# Altium PCB SensorPCB.PcbDoc
Units mm, origin at the board's own origin, x right, y up, seen from the top; angles counter-clockwise.
Board outline 28.5 x 13.3 mm, 2 copper layers (Top Layer, Bottom Layer); 21 components, 19 nets, 87 pads, 125 vias.
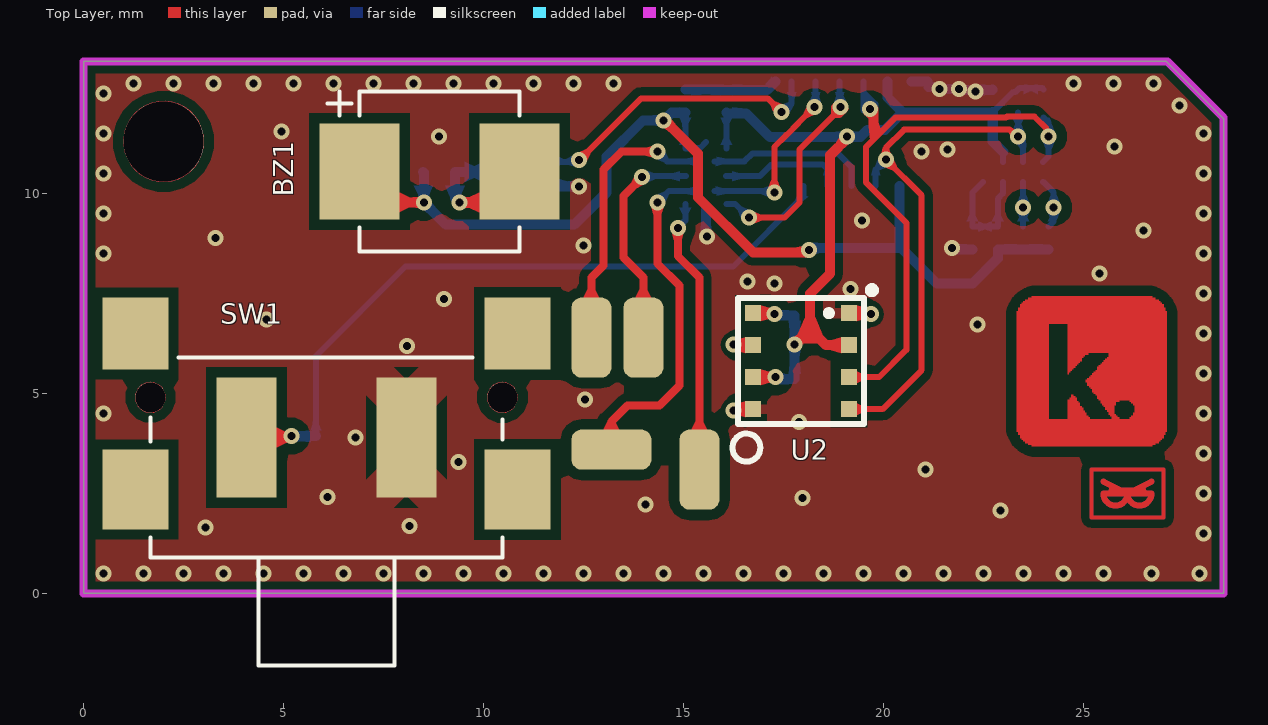
[diagram p0: Top Layer view]
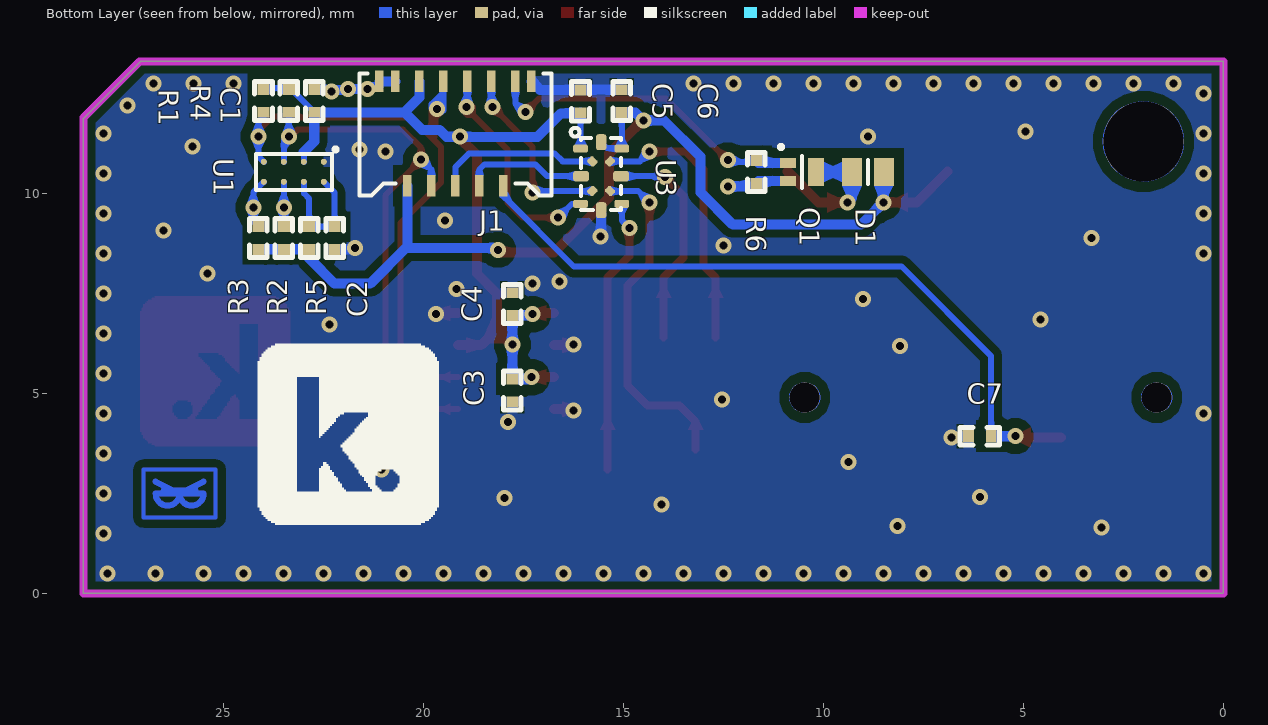
[diagram p1: Bottom Layer view, seen from below]
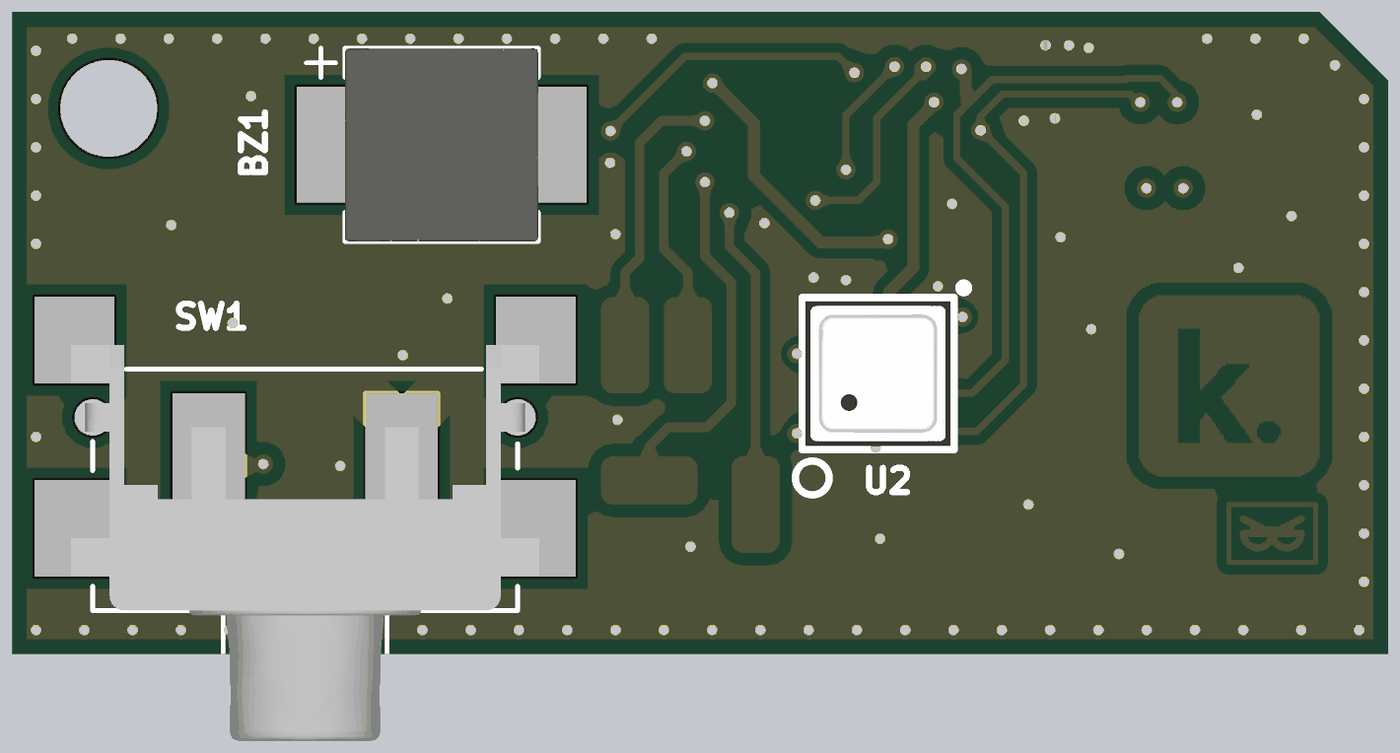
[diagram p2: 3D render of the assembled board from above, using the file's embedded part models]
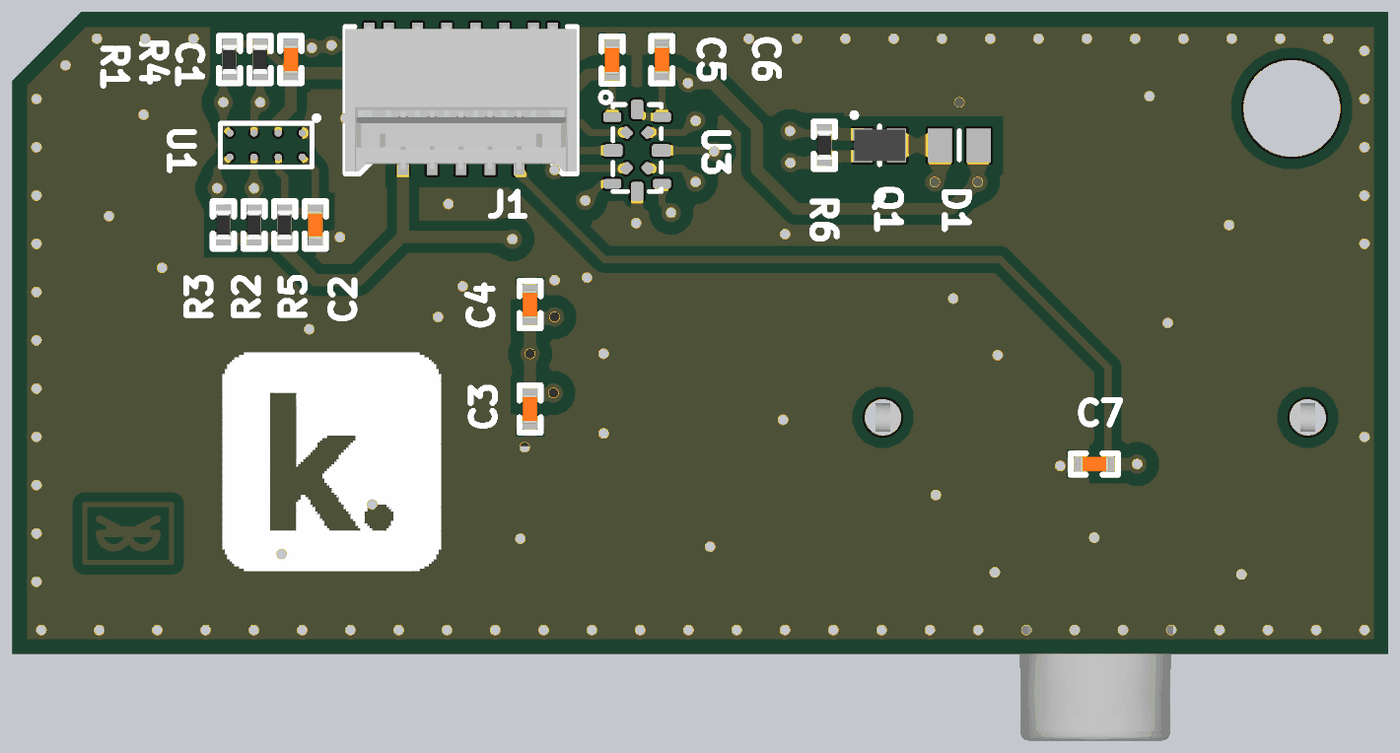
[diagram p3: 3D render of the assembled board from below, using the file's embedded part models]

## Layer stack, top to bottom
Top Solder: solder mask 0.0102, Solder Resist, Dk 3.5
Top Layer: signal copper 0.0356
Dielectric 1: dielectric 0.32, FR-4, Dk 4.8
Bottom Layer: signal copper 0.0356
Bottom Solder: solder mask 0.0102, Solder Resist, Dk 3.5

## Board outline
0.005,0.005 0.005,13.305 27.073,13.305 28.505,11.873 28.505,0.005

## Design rules (kind name [scope] priority, off if disabled: settings)
Clearance Clearance_2 [WithinRoom('ignore_clearence')  or WithinRoom('ignore_clearence_1') vs isPad  or IsTrack] p1: gap=0.1 ignorepadtopadclearanceinfootprint=FALSE
Clearance Clearance_1 [WithinRoom('J1_clearance') vs IsPad or IsTrack] p2: gap=0.12 ignorepadtopadclearanceinfootprint=FALSE
Clearance JLC_PCB_clearance [All] p3: gap=0.254 ignorepadtopadclearanceinfootprint=FALSE except(0: Arc-Text Arc-Hole Track-Text Track-Hole SMDPad-Hole THPad-Hole Via-Hole Fill-Hole Poly-Hole Region-Hole Text-Hole; 0.1: SMDPad-Text THPad-Text Via-Text Fill-Text Poly-Text Region-Text Text-Text; 0.127: Arc-Arc Arc-Track Arc-SMDPad Track-Track Track-SMDPad SMDPad-SMDPad; 0.2: Arc-THPad Arc-Via Arc-Fill Arc-Poly Arc-Region Track-THPad Track-Via Track-Fill Track-Poly Track-Region)
Clearance [All] p4: gap=0.254 ignorepadtopadclearanceinfootprint=FALSE except(0: Arc-Hole Track-Hole SMDPad-Hole THPad-Hole Via-Hole Fill-Hole Poly-Hole Region-Hole Text-Hole)
MinimumSolderMaskSliver [All] p1: minsoldermaskwidth=0
PlaneClearance "JLC_PCB_PowrPlane clearance" [All] p1: clearance=0.25
PlaneClearance [All] p2: clearance=0.508
PlaneConnect JLC_PCB_PowerPlane [All] p1: planeconnectstyle=Relief reliefexpansion=0.25 reliefentries=4 reliefconductorwidth=0.25 reliefairgap=0.15
PlaneConnect [All] p2: planeconnectstyle=Relief reliefexpansion=0.508 reliefentries=4 reliefconductorwidth=0.254 reliefairgap=0.254
PolygonConnect PolygonConnect_2 [InComponent('SW1')] p1: thpad.connectstyle=NoConnect thpad.reliefconductorwidth=0.254 thpad.reliefentries=4 thpad.polygonreliefangle="90 Angle" thpad.airgapwidth=0.254 smdpad.connectstyle=Relief smdpad.reliefconductorwidth=1 smdpad.reliefentries=4 smdpad.polygonreliefangle="45 Angle" smdpad.airgapwidth=0.254 via.connectstyle=Relief via.reliefconductorwidth=0.254 via.reliefentries=4 via.polygonreliefangle="90 Angle" via.airgapwidth=0.254
PolygonConnect PolygonConnect_1 [IsVia] p2: connectstyle=Direct reliefconductorwidth=0.254 reliefentries=4 polygonreliefangle="90 Angle" airgapwidth=0.254
PolygonConnect "JLC_PCB_Polygon connect" [All] p3: connectstyle=Relief reliefconductorwidth=0.254 reliefentries=4 polygonreliefangle="90 Angle" airgapwidth=0.15
PolygonConnect [All] p4: connectstyle=Relief reliefconductorwidth=0.254 reliefentries=4 polygonreliefangle="90 Angle" airgapwidth=0.254
RoomDefinition ignore_clearence_1 [False] p1: confinementstyle=ConfineIn formatcopy=TRUE lockcomponents=FALSE outline 9.825,11.4 12.485,11.4 12.485,10.05 9.825,10.05
RoomDefinition ignore_clearence [False] p2: confinementstyle=ConfineIn formatcopy=TRUE lockcomponents=FALSE outline 14.4,12.225 17.06,12.225 17.06,9.075 14.4,9.075
RoomDefinition J1_clearance [False] p3: confinementstyle=ConfineIn formatcopy=TRUE lockcomponents=FALSE outline 17.2,13.5 21.26,13.5 21.26,12.4 17.2,12.4
RoomDefinition KB [False] p4: confinementstyle=ConfineIn formatcopy=TRUE lockcomponents=FALSE outline 25.02,3.28 27.18,3.28 27.18,1.72 25.02,1.72
RoutingVias JLC_PCB_via [All] p1: holewidth=0.2 width=0.4 viastyle="Through Hole" minholewidth=0.2 minwidth=0.4 maxholewidth=0.5 maxwidth=1
RoutingVias [All] p2: holewidth=0.711 width=1.27 viastyle="Through Hole" minholewidth=0.711 minwidth=1.27 maxholewidth=0.711 maxwidth=1.27
SilkToSilkClearance [All] p1: silktosilkclearance=0.1
SilkToSolderMaskClearance [IsPad] p1: minsilkscreentomaskgap=0 clearancetoexposedcopper=TRUE
SolderMaskExpansion JLC_PCB_SolderMask [All] p1: expansion=0.05 istentingtop=FALSE
SolderMaskExpansion [All] p2: expansion=0.102 istentingtop=FALSE
Width Width_1 [WithinRoom('KB')] p1: maxlimit=0.254 minlimit=0.1 preferedwidth=0.254
Width JLC_PCB_width [All] p2: maxlimit=1 minlimit=0.127 preferedwidth=0.15
Width [All] p3: maxlimit=0.254 minlimit=0.254 preferedwidth=0.254
25 further rules are at their usual default settings.

## Components (designator, comment, footprint, x,y, rotation, side; value= is the part's Value field where it differs from the comment)
BZ1 "CMT-4023S-SMT-TR" CMT-4023S-SMT-TR 8.9,10.55 r0 top
C1 "100n" CAPC0603X03L_C 22.733,12.319 r270 bottom
C2 "100n" CAPC0603X03L_C 22.225,8.89 r90 bottom
C3 "100n" CAPC0603X03L_C 17.78,5.08 r90 bottom
C4 "100n" CAPC0603X03L_C 17.78,7.239 r270 bottom
C5 "100n" CAPC0603X03L_C 16.079,12.308 r270 bottom
C6 "100n" CAPC0603X03L_C 15.05,12.312 r270 bottom
C7 "100n" CAPC0603X03L_C 6.096,3.937 r180 bottom
D1 "BAS21LDYL" BAS21LDYL 8.89,10.541 r180 bottom
J1 "5047541100" 5047541100 19.208,11.5 r0 bottom locked
Q1 "RV2C010UNT2L" DFN65P100X40-3L 10.541,10.541 r180 bottom
R1 "4.7k" RESC0603X03L_C 24.003,12.319 r90 bottom
R2 "4.7k" RESC0603X03L_C 23.495,8.89 r270 bottom
R3 "4.7k" RESC0603X03L_C 24.13,8.89 r270 bottom
R4 "4.7k" RESC0603X03L_C 23.368,12.319 r90 bottom
R5 "200k" RESC0603X03L_C 22.86,8.89 r90 bottom
R6 "200k" RESC0603X03L_C 11.684,10.541 r270 bottom
SW1 "1571300-2" 1571300-2 6.073,4.905 r0 top locked
U1 "PCA9306YZTR" PCA9306YZTR 23.245,10.545 r270 bottom
U2 "BME680" BME680 17.937,5.812 r0 top locked
U3 "TXU0304DTRR" TXU0304DTR 15.561,10.435 r180 bottom

## Footprints (in the part's own frame and the unit in brackets; to place one, negate y for a bottom-side part, rotate by r counter-clockwise, add the part's x,y. Pads: shape width x height; smd on the part's side, far side on the other; paste and mask are expansions set on the pad)
1571300-2 [mm]
  rect 1.5x3 smd: P1(-2,-1) P2(2,-1)
  rect 1.65x2 smd: P3(-4.775,-2.3) P4(4.775,-2.3)
  rect 1.65x1.8 smd: P5(4.775,1.6) P6(-4.775,1.6)
  round 0.75 hole 0.75 unplated: P14(-4.4,0) P15(4.4,0)
  Multi-Layer circle w0.01: c-4.4,0 r0.375
  Multi-Layer circle w0.01: c4.4,0 r0.375
  silkscreen extent -4.4,-6.7 4.4,1, body extent -4.85,-6.7 4.85,1.5, height 8.1
5047541100 [mm] "Connector FPC11"
  rect 0.22x0.54 smd: P1(-1.5,-1.307) P2(-1.2,1.308) P3(-0.9,-1.307) P4(-0.6,1.308) P5(-0.3,-1.307) P6(0,1.308) P7(0.3,-1.307) P8(0.6,1.308) P9(0.9,-1.307) P10(1.2,1.308) P11(1.5,-1.307) P12(-1.9,-1.307) P13(1.9,-1.307)
  silkscreen extent -2.4,-1.5 2.4,1.55, body extent -2.4,-1.5 2.4,1.5, height 1.46
BAS21LDYL [mm]
  rect 0.5x0.7 smd: P1(-0.4,0) P2(0.4,0)
  silkscreen extent 0,-0.3 0,0.3, body extent -0.5,-0.3 0.5,0.3, height 0.4
BME680 [mm]
  rect 0.4x0.4 smd mask+0.1: 1(1.2,1.2) 2(1.2,0.4) 3(1.2,-0.4) 4(1.2,-1.2) 5(-1.2,-1.2) 6(-1.2,-0.4) 7(-1.2,0.4) 8(-1.2,1.2)
  silkscreen extent -1.71,-2.51 1.83,1.82, body extent -1.5,-1.5 1.5,1.5, height 0.93
CAPC0603X03L_C [mm]
  rect 0.27x0.3 smd mask+0.05: 1(-0.285,0) 2(0.285,0)
  silkscreen extent -0.49,-0.22 0.49,0.22, body extent -0.3,-0.15 0.3,0.15, height 0.3
CMT-4023S-SMT-TR [mm] "Buzzer"
  rect 2x2.4 smd: P1(-2,0) P2(2,0)
  silkscreen extent -2.8,-2 2,2, body extent -2,-2 2,2, height 2
DFN65P100X40-3L [mm]
  rect 0.4x0.25 smd: 1(-0.35,0.225) 2(-0.35,-0.225)
  rect 0.4x0.7 smd: 3(0.35,0)
  silkscreen extent -0.58,-0.4 0,0.67, body extent -0.53,-0.33 0.53,0.33, height 0.4
PCA9306YZTR [mm] "BGA, 8-Leads, Body 1.9x0.9mm, Pitch 0.5mm"
  round 0.15 smd: A1(-0.25,0.75) A2(0.25,0.75) B1(-0.25,0.25) B2(0.25,0.25) C1(-0.25,-0.25) C2(0.25,-0.25) D1(-0.25,-0.75) D2(0.25,-0.75)
  silkscreen extent -0.61,-0.95 0.45,1.09, body extent -0.45,-0.95 0.45,0.95, height 0.63
RESC0603X03L_C [mm]
  rect 0.27x0.3 smd: 1(-0.285,0) 2(0.285,0)
  silkscreen extent -0.49,-0.22 0.49,0.22, body extent -0.3,-0.15 0.3,0.15, height 0.23
TXU0304DTR [mm]
  rrect50% 0.37x0.2 smd mask+0.05: P1(-0.515,0.69) P5(-0.515,-0.69) P7(0.515,-0.69) P11(0.515,0.69)
  rrect50% 0.2x0.23 smd rot 45 mask+0.05: P2(-0.22,0.37) P8(0.22,-0.37)
  rrect50% 0.4x0.26 smd mask+0.05: P3(-0.5,0) P9(0.5,0)
  rrect50% 0.2x0.23 smd rot 135 mask+0.05: P4(-0.22,-0.37) P10(0.22,0.37)
  rrect50% 0.26x0.4 smd mask+0.05: P6(0,-0.85) P12(0,0.85)
  silkscreen extent -0.76,-0.85 0.5,1.21, body extent -0.5,-0.85 0.5,0.85, height 0.4

## Part data
BZ1: "4 mm, 3 Vo-p, 70 dB, Surface Mount (SMT), Magnetic Audio Transducer Buzzer", Frequency=4kHz, Manufacturer=CUI, Max Operating Temperature=70°C, Min Operating Temperature=-20°C, Operating Supply Current=90mA, Supplier Part Number 1=490-CMT-4023S-SMT-TR, Voltage Rating=3V, Category="Audio Products", ComponentLink1Description=https://www.cui.com/product/resource/digikeypdf/cmt-4023s-smt.pdf?src-supplier=Digi-Key, ComponentLink1URL=https://www.cui.com/product/resource/digikeypdf/cmt-4023s-smt.pdf?src-supplier=Digi-Key, ComponentLink2Description=http://www.cui.com/product/resource/digikeypdf/cmt-4023s-smt.pdf?src-supplier=Digi-Key, ComponentLink2URL=http://www.cui.com/product/resource/digikeypdf/cmt-4023s-smt.pdf?src-supplier=Digi-Key, Lead Free="Lead Free", Length=4mm, Manufacturer Part Number=CMT-4023S-SMT-TR, Mount="Surface Mount", Packaging="Tape and Reel", RoHS=No, Sensing Method=Magnetic, Supplier 1=Mouser, Termination=Solder, Width=4mm
C1 C2 C3 C4 C5 C6 C7: library part C0201
D1: "BAS21LD/SOD882/SOD2", Manufacturer=Nexperia, Supplier Part Number 1=771-BAS21LDYL, Manufacturer Part Number=BAS21LDYL, Pricing 1="1=0.30000, 10=0.23700, 50=0.23700, 100=0.12600, 1000=0.05700, 10000=0.03900 (USD)", RoHS=No, Stock 1=752, Supplier 1=Mouser
J1: "Conn FFC/FPC Connector SKT 11 POS 0.3mm Solder RA SMD Easy-On™ T/R", Contact Resistance=30mOhm, Manufacturer="Wurth Elektronik", Manufacturer Part Number=687124182122, Operating Temperature="-25 to +85degC", Rated Current=0.5A, Supplier Part Number 1=538-504754-1100, Working Voltage=50VAC, Category="FFC / FPC", ComponentLink1Description=Manufacturer, ComponentLink1URL=http://www.we-online.de, ComponentLink2Description=Datasheet, ComponentLink2URL=https://katalog.we-online.com/em/datasheet/687124182122.pdf, ComponentLink3Description=https://www.molex.com/pdm_docs/ps/PS-504754-002.pdf?src-supplier=Digi-Key, ComponentLink3URL=https://www.molex.com/pdm_docs/ps/PS-504754-002.pdf?src-supplier=Digi-Key, Length=14mm, Mounting Technology=SMT, Packaging="Tape and Reel", Pin Number=24, Pitch=0.5mm, Pricing 1="1=0.78000, 10=0.62000, 50=0.62000, 100=0.51700, 500=0.51200, 1000=0.51200, 5000=0.41900, 10000=0.41100, 25000=0.35200 (USD)", Published Date="March 2021", RoHS=No, Stock 1=21094, Supplier 1=Mouser, Type=Horizontal
Q1: "N-Channel MOSFET, 20V, 1A, 470mOhm, 400mW", Manufacturer="Rohm Semiconductor", Part number IPS=00000009976, Supplier Part Number 1=RV2C010UNT2LCT-ND, Artikkelnr Noca=35010020, Component Class=Semiconductors, ComponentLink1Description=Datasheet, ComponentLink1URL=N.A., ComponentLink2Description="Supplier link", ComponentLink2URL=N.A., Footprint Doc=DFN-3, HelpURL=http://rohmfs.rohm.com/en/products/databook/datasheet/discrete/transistor/mosfet/rv2c010unt2l-e.pdf, LatestRevisionDate=2016-08-09, Manufacturer Part Number=RV2C010UNT2L, Note=N.A., Pad Count=3, Part Number=RV2C010UNT2L, PartId=101300132, Published=2016-08-09, Supplier 1=Digi-Key, Supplier 2=Mouser, Supplier Part Number 2=755-RV2C010UNT2L
R1 R2 R3 R4 R5 R6: library part R0201
SW1: "Switch Tactile OFF (ON) SPST Round Button Gull Wing 0.05A 12VDC 1.27N SMD Loose Piece", Manufacturer="TE Connectivity", Supplier Part Number 1=571-15713002, Category="Pushbutton Switches", ComponentLink1Description=https://datasheet.ciiva.com/2901/eng-cd-1571300-j-2901544.pdf?src-supplier=Digi-Key, ComponentLink1URL=https://datasheet.ciiva.com/2901/eng-cd-1571300-j-2901544.pdf?src-supplier=Digi-Key, ComponentLink2Description=https://datasheet.ciiva.com/30102/eng-cat-1308390-0904-e26-e28-30102661.pdf?src-supplier=Onlinecomponents.com, ComponentLink2URL=https://datasheet.ciiva.com/30102/eng-cat-1308390-0904-e26-e28-30102661.pdf?src-supplier=Onlinecomponents.com, ComponentLink3Description=https://datasheet.ciiva.com/15226/getdatasheetpartid-240878-15226635.pdf?src-supplier=Verical, ComponentLink3URL=https://datasheet.ciiva.com/15226/getdatasheetpartid-240878-15226635.pdf?src-supplier=Verical, ComponentLink4Description=https://datasheet.ciiva.com/8164/eng-cs-1308111-1-switches-core-program-catalog-0308-8164774.pdf?src-supplier=Avnet, ComponentLink4URL=https://datasheet.ciiva.com/8164/eng-cs-1308111-1-switches-core-program-catalog-0308-8164774.pdf?src-supplier=Avnet, Manufacturer Part Number=1571300-2, Pricing 1="1=0.69000, 10=0.66000, 50=0.62500, 100=0.55100, 1000=0.41800, 10000=0.39300 (USD)", RoHS=Yes, Stock 1=17816, Supplier 1=Mouser
U1: "PCA9306 2-BIT Bidirectional I2C", 5V Tolerant I/O=Yes, Manufacturer="Texas Instruments", Max Frequency(kHz)=400, Max Operating Temperature=85°C, Max Supply Voltage=5.5V, Min Operating Temperature=-40°C, Min Supply Voltage=1.2V, On-Chip Power-on-Reset=No, Package Quantity=3000, Rating=Catalog, Supplier Part Number 1=595-PCA9306YZTR, Category="Voltage Level Shifters", ComponentLink1Description=Datasheet, ComponentLink1URL=http://www.ti.com/general/docs/lit/getliterature.tsp?genericPartNumber=PCA9306&fileType=pdf, ComponentLink2Description="Package Specification", ComponentLink2URL=http://www.ti.com/litv/pdf/mpds049b, ComponentLink3Description=https://datasheet.ciiva.com/1504/1862428-1504150.pdf?src-supplier=Element14, ComponentLink3URL=https://datasheet.ciiva.com/1504/1862428-1504150.pdf?src-supplier=Element14, ComponentLink4Description=https://datasheet.ciiva.com/1899/pca9306-1899336.pdf?src-supplier=Digi-Key, ComponentLink4URL=https://datasheet.ciiva.com/1899/pca9306-1899336.pdf?src-supplier=Digi-Key, ComponentLink5Description=https://datasheet.ciiva.com/1899/pca9306-1899335.pdf?src-supplier=Digi-Key, ComponentLink5URL=https://datasheet.ciiva.com/1899/pca9306-1899335.pdf?src-supplier=Digi-Key, ComponentLink6Description=https://datasheet.ciiva.com/1899/pca9306-1899337.pdf?src-supplier=Digi-Key, ComponentLink6URL=https://datasheet.ciiva.com/1899/pca9306-1899337.pdf?src-supplier=Digi-Key, Contact Plating=Copper,Tin,Silver, DatasheetVersion=SCPS113J, Eco-Plan="Green (RoHS & no Sb/Br)", Enable Pin=Yes, fSCLK(Max)(MHz)=400, Function="Voltage Translator", Lead Free="Lead Free", Logic Function=Translator, Manufacturer Part Number=PCA9306YZTR, Mounting Technology="Surface Mount", No. of Outputs=2, Number of Bits=2, Number of Channels=2, Number of Outputs=2, Number of Pins=8, Open Drain I/O Type=Yes, Output Type=I2C, PackageDescription="8-Ball Die-Size Ball Grid Array, 1.9 x 0.9 mm Body, 0.5 mm Pitch, Pb-Free", PackageReference=YZT8, PackageVersion="revF, Oct-2006", Packaging="Tape and Reel", PartNumber=PCA9306YZTR, Pricing 1="1=0.97000, 10=0.87600, 25=0.83100, 50=0.83100, 100=0.68300, 250=0.63900, 500=0.56400, 1000=0.44600, 10000=0.44600 (USD)", Propagation Delay=0.3ns, REACH SVHC="No SVHC", RoHS=Yes, RoHS Compliant=Yes, Series=-, SubFamily="I2C Special Function", Supplier 1=Mouser, tpd max(ns)=1.5, Vcc range(V)="0 to 5.5", Weight=8.1E-05oz
U2: "Low power gas, pressure, temperature & humidity sensor", Manufacturer=Bosch, Part number IPS=00000001800, Supplier Part Number 1=828-1077-1-ND, Artikkelnr Noca=N.A., Component Class=Misc_ICs, ComponentLink1Description=Datasheet, ComponentLink1URL=https://ae-bst.resource.bosch.com/media/_tech/media/datasheets/BST-BME680-DS001-00.pdf, ComponentLink2Description="Supplier link", ComponentLink2URL=N.A., Footprint Doc=LGA-8, HelpURL=N.A., LatestRevisionDate=2018-05-24, Manufacturer Part Number=BME680, Note=N.A., Pad Count=8, Part Number=BME680, PartId=101900532, Published=2018-05-24, Supplier 1=Digi-Key, Supplier 2=N.A., Supplier Part Number 2=N.A.
U3: "Four-channel fixed multidirectional level shifter 12-X2QFN -40 to 125", Manufacturer="Texas Instruments", Supplier Part Number 1=595-TXU0304DTRR, Manufacturer Part Number=TXU0304DTRR, Pricing 1="1=0.87000, 10=0.78200, 50=0.74200, 100=0.61000, 1000=0.39800, 10000=0.38500 (USD)", RoHS=No, Supplier 1=Mouser

## Free pads (board coordinates)
  rrect50% 1x2 smd paste-10 mask+0.05: 5(12.7,6.4) 5(14,6.4) 5(15.4,3.1)
  rrect50% 2x1 smd paste-10 mask+0.05: 5(13.2,3.6)
  round 2 hole 2 unplated: P13(2.005,11.305)

## Via types
v1: diameter 0.4, hole 0.2, Top Layer to Bottom Layer, tented both sides, 125 vias

## Nets (pads, with @x,y where several pads share a name; then routed paths per layer and width w, separated by ;. In a path a pad name is that pad's centre, name@x,y a point inside that pad or via, vN(x,y) a via of type N, cw(c..) or ccw(c..) an arc to the next point about the centre after c; other vN are vias at no path point)
1V8: C1.2 C3.2 C4.2 C5.2 J1.P9 R1.2 R4.2 U1.B1 U2.2 U2.6 U2.8 U3.P1 | length 22.5
  Top Layer w0.25: U2.6 17.296,5.412 v1(17.297,5.411) ; U2.8 17.245,7.012 v1(17.272,6.985) ; v1(17.78,6.223) 18.165,6.608 ; v1(19.095,11.433) 19.095,11.399 19.101,11.392 18.669,10.96 18.669,8.001 18.165,7.497 18.165,6.608 ; U2.2 18.561,6.212 18.165,6.608
  Bottom Layer w0.15: U3.P1 16.076,12.02 C5.2 ; C1.2 22.748,12.034 22.808,12.094 22.808,12.105 22.97,12.267 23.248,12.544 23.308,12.544 23.399,12.635 23.972,12.635 R1.2 ; U1.B1 22.995,11.041
  Bottom Layer w0.25: C5.2 16.093,12.009 16.566,12.009 17.159,11.416 19.423,11.416 19.604,11.597 20.041,11.597 20.478,12.034 ; v1(17.272,6.985) 17.303,6.954 C4.2 v1(17.78,6.223) C3.2 17.343,5.365 v1(17.297,5.411) ; J1.P9 20.108,12.404 20.478,12.034 ; C1.2 20.478,12.034
  Bottom Layer w0.254: C1.2 22.733,11.303 22.995,11.041
3V3: BZ1.P1 C6.2 D1.P2 J1.P10 R2.2 R3.2 R5.1 U3.P11 U3.P12 | length 26.7
  Top Layer w0.25: BZ1.P1 7.671,9.779 v1(8.509,9.779) ; v1(14.508,11.83) 14.535,11.83 15.367,10.997 15.367,9.906 16.743,8.53 18.089,8.53 18.15,8.591 v1(18.144,8.596)
  Bottom Layer w0.15: U3.P11 C6.2@15.046,12.023 ; U3.P11@15.054,11.133 15.221,11.133 15.226,11.138 15.415,11.138 U3.P12
  Bottom Layer w0.25: D1.P2 8.509,10.522 v1(8.509,9.779) 9.066,9.222 12.27,9.222 13.081,10.033 13.081,10.922 13.989,11.83 v1(14.508,11.83) 14.701,12.023 C6.2@15.046,12.023 ; v1(18.144,8.596) 18.155,8.596 18.205,8.646 20.437,8.646 ; J1.P10 20.408,8.675 21.336,7.747 22.225,7.747 22.86,8.382 R5.1 R2.2 R3.2
BUTT: C7.2 J1.P2 SW1.P1 | length 17.9
  Top Layer w0.254: SW1.P1 5.175,3.905 v1(5.207,3.937)
  Bottom Layer w0.15: C7.2 5.811,5.938 8.05,8.177 16.242,8.177 18.008,9.943 J1.P2
  Bottom Layer w0.254: v1(5.207,3.937) C7.2
BUZZ: J1.P1 Q1.1 R6.1 | length 8.3
  Top Layer w0.15: v1(12.396,10.835) 13.945,12.384 17.108,12.384 v1(17.448,12.044)
  Bottom Layer w0.15: R6.1 11.717,10.793 12.353,10.793 v1(12.396,10.835) ; v1(17.448,12.044) 17.505,12.044 17.708,12.247 J1.P1
  Bottom Layer w0.254: Q1.1 11.624,10.766 R6.1
GND: C1.1 C2.1 C3.1 C4.1 C5.1 C6.1 C7.1 J1.P11 J1.P12 J1.P13 Q1.2 R6.2 SW1.P2 U1.A1 U2.1 U2.5 U2.7 U3.P6 | length 8.7
  Top Layer w0.25: v1(16.256,4.572) 16.296,4.612 U2.5 ; v1(16.256,6.223) 16.267,6.212 U2.7 ; U2.1 19.658,7.012 v1(19.685,6.985)
  Bottom Layer w0.25: Q1.2 11.624,10.316 R6.2 11.761,10.179 v1(12.388,10.179) ; C6.1 15.978,12.597 15.982,12.593 C5.1 17.093,12.593 J1.P12 ; U3.P6 15.561,8.953 v1(15.584,8.93) ; J1.P11 J1.P13 ; J1.P13@21.123,12.662 21.26,12.662 21.316,12.662 21.365,12.613 v1(21.406,12.613) 21.407,12.612 21.888,12.612 21.915,12.585 22.274,12.585 v1(22.3,12.559) 22.341,12.559 22.376,12.594 22.723,12.594 C1.1 ; v1(21.717,8.636) 21.748,8.605 C2.1
  other v1: 0.5,0.5 1.5,0.5 2.5,0.5 3.5,0.5 4.5,0.5 5.5,0.5 6.5,0.5 7.5,0.5 8.5,0.5 9.5,0.5 10.5,0.5 11.5,0.5 12.5,0.5 13.5,0.5 14.5,0.5 15.5,0.5 16.5,0.5 17.5,0.5 18.5,0.5 19.5,0.5 20.5,0.5 21.5,0.5 22.5,0.5 23.5,0.5 24.5,0.5 25.5,0.5 26.7,0.5 27.9,0.5 28,1.5 3.048,1.651 8.155,1.696 22.925,2.075 14.053,2.226 17.979,2.392 6.096,2.413 28,2.5 21.05,3.1 9.376,3.297 28,3.5 6.8,3.9 17.89,4.284 0.5,4.5 28,4.5 12.54,4.855 28,5.5 8.095,6.193 28,6.5 28,6.5 22.352,6.731 4.572,6.858 9.017,7.366 28,7.5 19.177,7.62 17.272,7.747 16.6,7.8 25.4,8.001 0.5,8.5 28,8.5 12.5,8.7 3.302,8.89 26.5,9.075 19.47,9.327 0.5,9.5 28,9.5 0.5,10.5 28,10.5 20.955,11.049 21.6,11.1 25.781,11.176 8.89,11.43 0.5,11.5 28,11.5 4.953,11.557 27.4,12.2 0.5,12.5 21.89,12.61 1.25,12.75 2.25,12.75 3.25,12.75 4.25,12.75 5.25,12.75 6.25,12.75 7.25,12.75 8.25,12.75 9.25,12.75 10.25,12.75 11.25,12.75 12.25,12.75 13.25,12.75 24.75,12.75 25.75,12.75 26.75,12.75
NetBZ1_P2: BZ1.P2 D1.P1 Q1.3 | length 3.5
  Top Layer w0.254: v1(9.398,9.779) 10.129,9.779 BZ1.P2
  Bottom Layer w0.254: v1(9.398,9.779) 9.29,9.887 D1.P1 Q1.3
NetC2_2: C2.2 R5.2 U1.A2 U1.B2 | length 3
  Bottom Layer w0.15: U1.A2 22.225,10.025 C2.2 R5.2 22.86,9.876 22.987,10.003 22.987,10.287 U1.B2
SCL: J1.P8 R4.1 U1.C1 U2.4 | length 13.8
  Top Layer w0.15: U2.4 19.979,4.612 20.955,5.588 20.955,9.959 v1(20.062,10.852) 20.062,11.142 20.52,11.6 23.155,11.6 23.325,11.43 v1(23.368,11.43)
  Bottom Layer w0.15: J1.P8 19.808,10.598 v1(20.062,10.852) ; R4.1 v1(23.368,11.43) 23.495,11.303 U1.C1
SCL2: R2.1 U1.C2 | length 1.1
  Bottom Layer w0.15: R2.1 v1(23.495,9.652) U1.C2
SDA: J1.P7 R1.1 U1.D1 U2.3 | length 17.6
  Top Layer w0.15: U2.3 19.89,5.412 20.574,6.096 20.574,9.271 19.57,10.275 19.57,11.17 19.735,11.335 ; v1@19.583,12.016 19.703,11.896 ; v1(19.665,12.122) 19.703,12.084 v1@19.703,12.021 ; v1@19.799,12.126 19.802,12.124 19.802,11.761 ; v1(24.13,11.43) 24.082,11.478 24.082,11.618 23.772,11.928 23.094,11.928 23.066,11.9 20.3,11.9 19.9,11.5 ; 19.703,11.697 19.703,11.896 ; 19.703,11.697 19.735,11.335 ; 19.703,11.697 19.9,11.5 ; 19.703,11.896 v1@19.703,12.021 ; v1@19.703,12.021 19.802,11.761 ; 19.735,11.335 19.9,11.5 ; 19.802,11.761 19.9,11.5
  Bottom Layer w0.15: J1.P7 19.508,12.526 ; v1@19.552,12.04 19.508,12.083 19.508,12.245 ; v1(19.665,12.122) 19.632,12.122 19.508,12.245 ; v1@19.705,12.141 19.618,12.229 19.618,12.417 ; v1@19.798,12.13 19.798,12.237 19.618,12.417 ; U1.D1 24.13,10.93 v1(24.13,11.43) 24.13,11.78 R1.1@24.003,11.907 ; 19.508,12.245 19.508,12.526 ; 19.508,12.526 19.618,12.417
SDA2: R3.1 U1.D2 | length 1.3
  Bottom Layer w0.15: U1.D2 24.257,10.033 v1(24.257,9.652) 24.257,9.302 R3.1
SPI_CLK: J1.P6 U3.P2 | length 4.1
  Bottom Layer w0.15: U3.P2 16.524,10.805 16.728,11.009 18.862,11.009 19.208,10.663 J1.P6
SPI_CLK2: pad.5@12.7,6.4 U3.P10 | length 7
  Top Layer w0.2: pad.5@12.7,6.4 12.7,7.9 13,8.2 13,10.6 13.449,11.049 v1(14.351,11.049)
  Bottom Layer w0.15: v1(14.351,11.049) 14.595,10.805 U3.P10
SPI_CS: J1.P3 U3.P4 | length 4.7
  Top Layer w0.15: v1(17.272,10.033) 17.272,11.164 17.571,11.463 17.576,11.463 17.874,11.761 17.874,11.766 v1(18.277,12.17)
  Bottom Layer w0.15: U3.P4 17.24,10.065 v1(17.272,10.033) ; v1(18.277,12.17) 18.308,12.2 J1.P3
SPI_CS2: pad.5@13.2,3.6 U3.P8 | length 8.7
  Top Layer w0.2: pad.5@13.2,3.6 13.2,4.3 13.6,4.7 14.4,4.7 14.9,5.2 14.9,7.7 14.351,8.249 v1(14.351,9.779)
  Bottom Layer w0.15: v1(14.351,9.779) 14.637,10.065 U3.P8
SPI_MISO: J1.P5 U3.P5 | length 6.2
  Top Layer w0.15: v1(16.637,9.398) 17.526,9.398 17.907,9.779 17.907,11.107 18.762,11.962 ; v1@18.811,12.209 18.762,12.16 18.762,11.962 ; v1(18.931,12.167) 18.931,12.131 18.762,11.962 ; v1@19.054,12.116 18.901,11.962 18.762,11.962
  Bottom Layer w0.15: U3.P5 16.29,9.745 v1(16.637,9.398) ; J1.P5 18.908,12.242 18.882,12.216 v1(18.931,12.167)
SPI_MISO2: pad.5@15.4,3.1 U3.P7 | length 6.9
  Top Layer w0.2: v1(14.859,9.144) 14.859,8.441 15.4,7.9 pad.5@15.4,3.1
  Bottom Layer w0.15: v1(14.859,9.144) 15.046,9.331 U3.P7
SPI_MOSI: J1.P4 U3.P3 | length 3.1
  Bottom Layer w0.15: U3.P3 16.912,10.435 17.209,10.732 18.478,10.732 18.608,10.602 J1.P4
SPI_MOSI2: pad.5@14,6.4 U3.P9 | length 5.5
  Top Layer w0.15: v1(13.97,10.414) v1@13.986,10.414
  Top Layer w0.2: v1(13.97,10.414) 13.5,9.944 13.5,8.4 14,7.9 pad.5@14,6.4
  Bottom Layer w0.15: v1(13.97,10.414) 13.991,10.435 U3.P9
pads on no net: SW1.P3 SW1.P4 SW1.P5 SW1.P6 SW1.P14 SW1.P15
copper on no net: | length 20.9
  Top Layer w0.1: 25.2,1.9 27,1.9 27,3.1 25.2,3.1 25.2,1.9
  Top Layer w0.15: 25.5,2.8 26.1,2.5 ; 26.7,2.8 26.1,2.5 ; 26.1,2.5 ccw(c26.4,2.5) 26.4,2.2 ccw(c26.4,2.5) 26.7,2.5 25.5,2.5 ccw(c25.8,2.5) 25.8,2.2 ccw(c25.8,2.5) 26.1,2.5
  Bottom Layer w0.1: 25.2,1.9 25.2,3.1 27,3.1 27,1.9 25.2,1.9
  Bottom Layer w0.15: 25.5,2.8 26.1,2.5 ; 26.7,2.8 26.1,2.5 ; 26.1,2.5 cw(c25.8,2.5) 25.8,2.2 cw(c25.8,2.5) 25.5,2.5 26.7,2.5 cw(c26.4,2.5) 26.4,2.2 cw(c26.4,2.5) 26.1,2.5

## Polygon pours and split planes (outlines as drawn)
GND on Top Layer "topgnd" (solid, remove dead copper, pour order 2): 0,13.305 28.505,13.305 28.505,0 0,0
GND on Bottom Layer "botgnd" (solid, remove dead copper, pour order 0): 0,13.305 28.505,13.305 28.505,0 0,0

## Keep-outs
Keep-Out Layer:
  lines w0.2: 0,0 28.5,0 28.5,11.9 27.1,13.3 0,13.3 0,0

## Other copper
Top Layer:
  region: 215 vertices and 2 holes, not listed, extent 23.336,3.682 27.086,7.432
Multi-Layer:
  circle w0.01: c2.005,11.305 r1

## Silkscreen, mask and mechanical layers (free items; w line width, h text height)
Bottom Overlay:
  region: 215 vertices and 2 holes, not listed, extent 19.624,1.723 24.149,6.248
Mechanical 1:
  the board outline again, w0.01
Assembly Notes:
  circle w0.01: c2.005,11.305 r2
  circle w0.01: c17.937,5.812 r0.5
  lines w0.01: 6.073,1.01 6.073,6.405 ; 1.223,6.405 2.023,6.405 2.023,5.605 1.223,5.605 1.223,6.405 ; 1.223,6.405 10.923,6.405 ; 10.923,6.405 10.123,6.405 10.123,5.605 10.923,5.605 10.923,6.405 ; 1.223,1.605 2.023,1.605 2.023,2.405 1.223,2.405 1.223,1.605 ; 1.523,4.605 1.823,4.605 1.823,5.205 1.523,5.205 1.523,4.605 ; 3.723,2.625 4.423,2.625 4.423,4.705 3.723,4.705 3.723,2.625 ; 7.723,2.625 7.723,4.705 8.423,4.705 8.423,2.625 7.723,2.625 ; 10.123,1.605 10.123,2.405 10.923,2.405 10.923,1.605 10.123,1.605 ; 10.323,4.605 10.623,4.605 10.623,5.205 10.323,5.205 10.323,4.605 ; 12.887,0.762 12.887,10.862 22.987,10.862 22.987,0.762 12.887,0.762